# Altium PCB HBridge_V2.3.PcbDoc
Units mil, origin at the board's own origin, x right, y up, seen from the top; angles counter-clockwise.
Board outline 1300 x 1250 mil, 2 copper layers (Top Layer, Bottom Layer); 37 components, 32 nets, 126 pads, 32 vias.
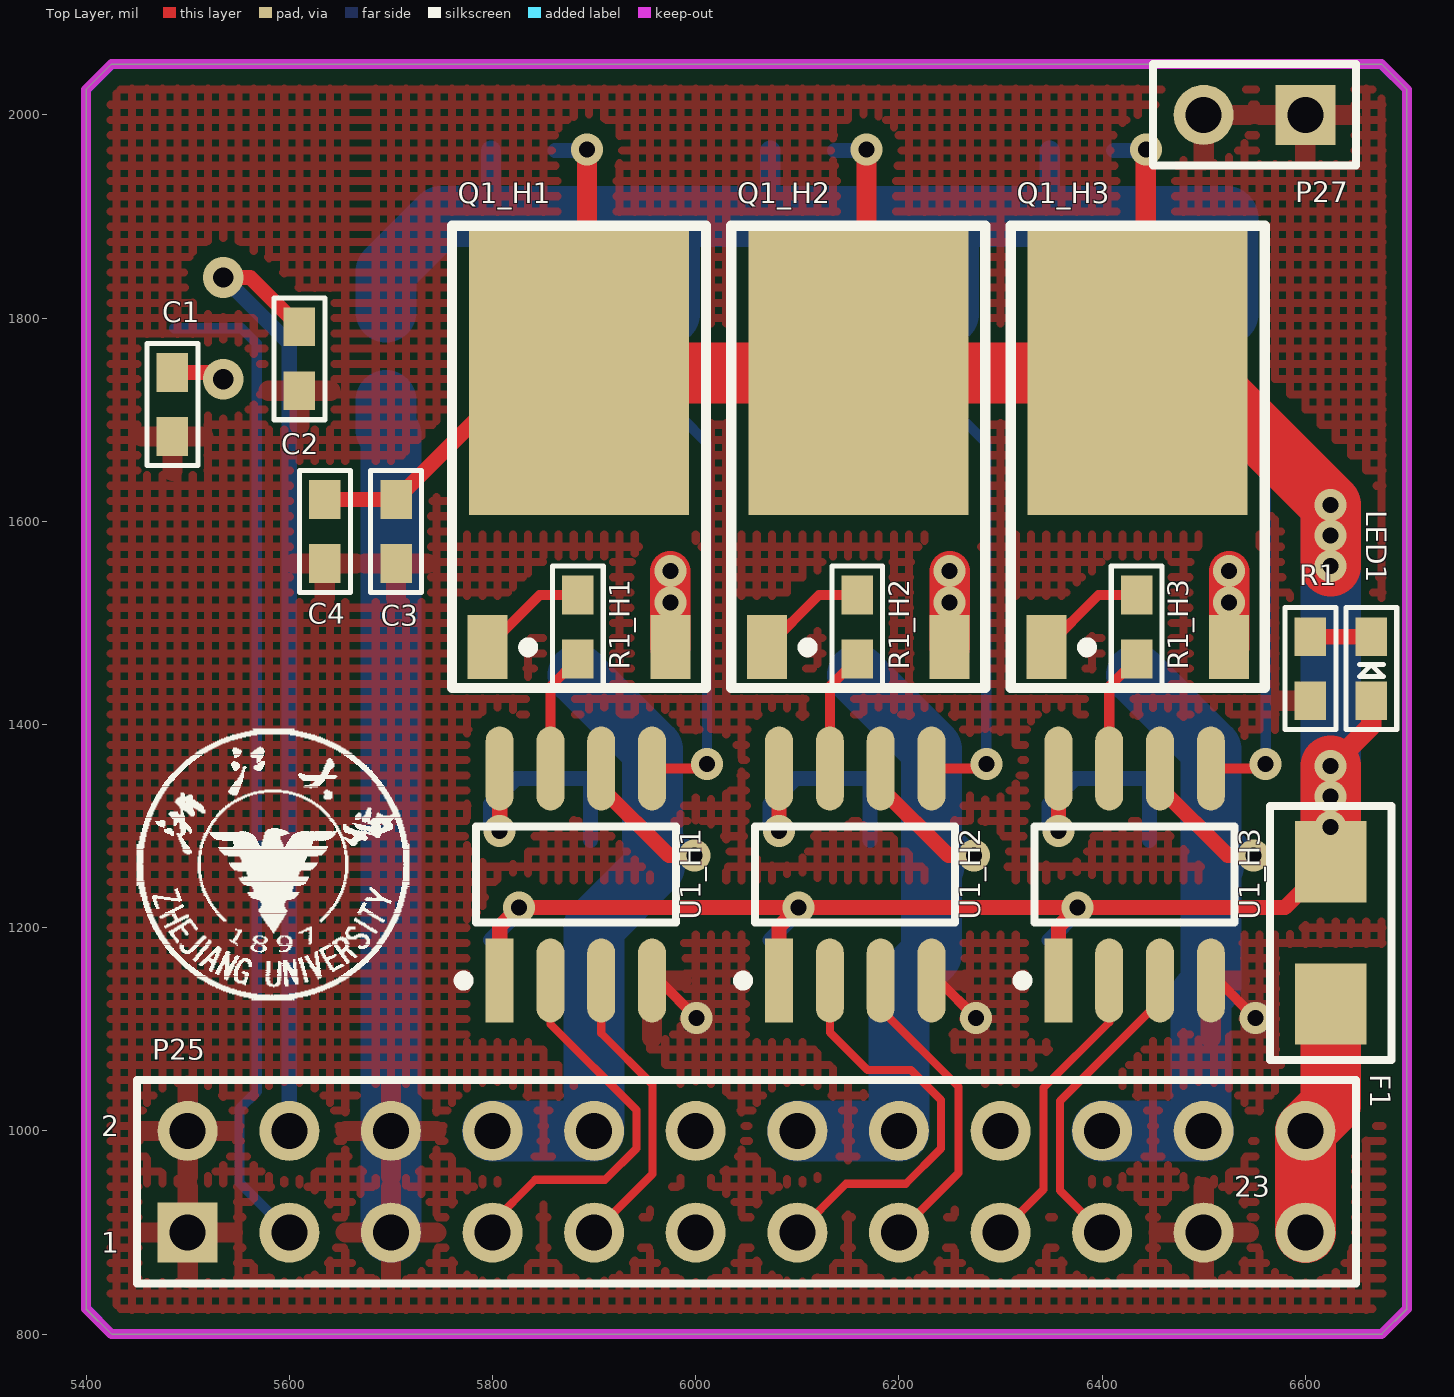
[diagram p0: Top Layer view]
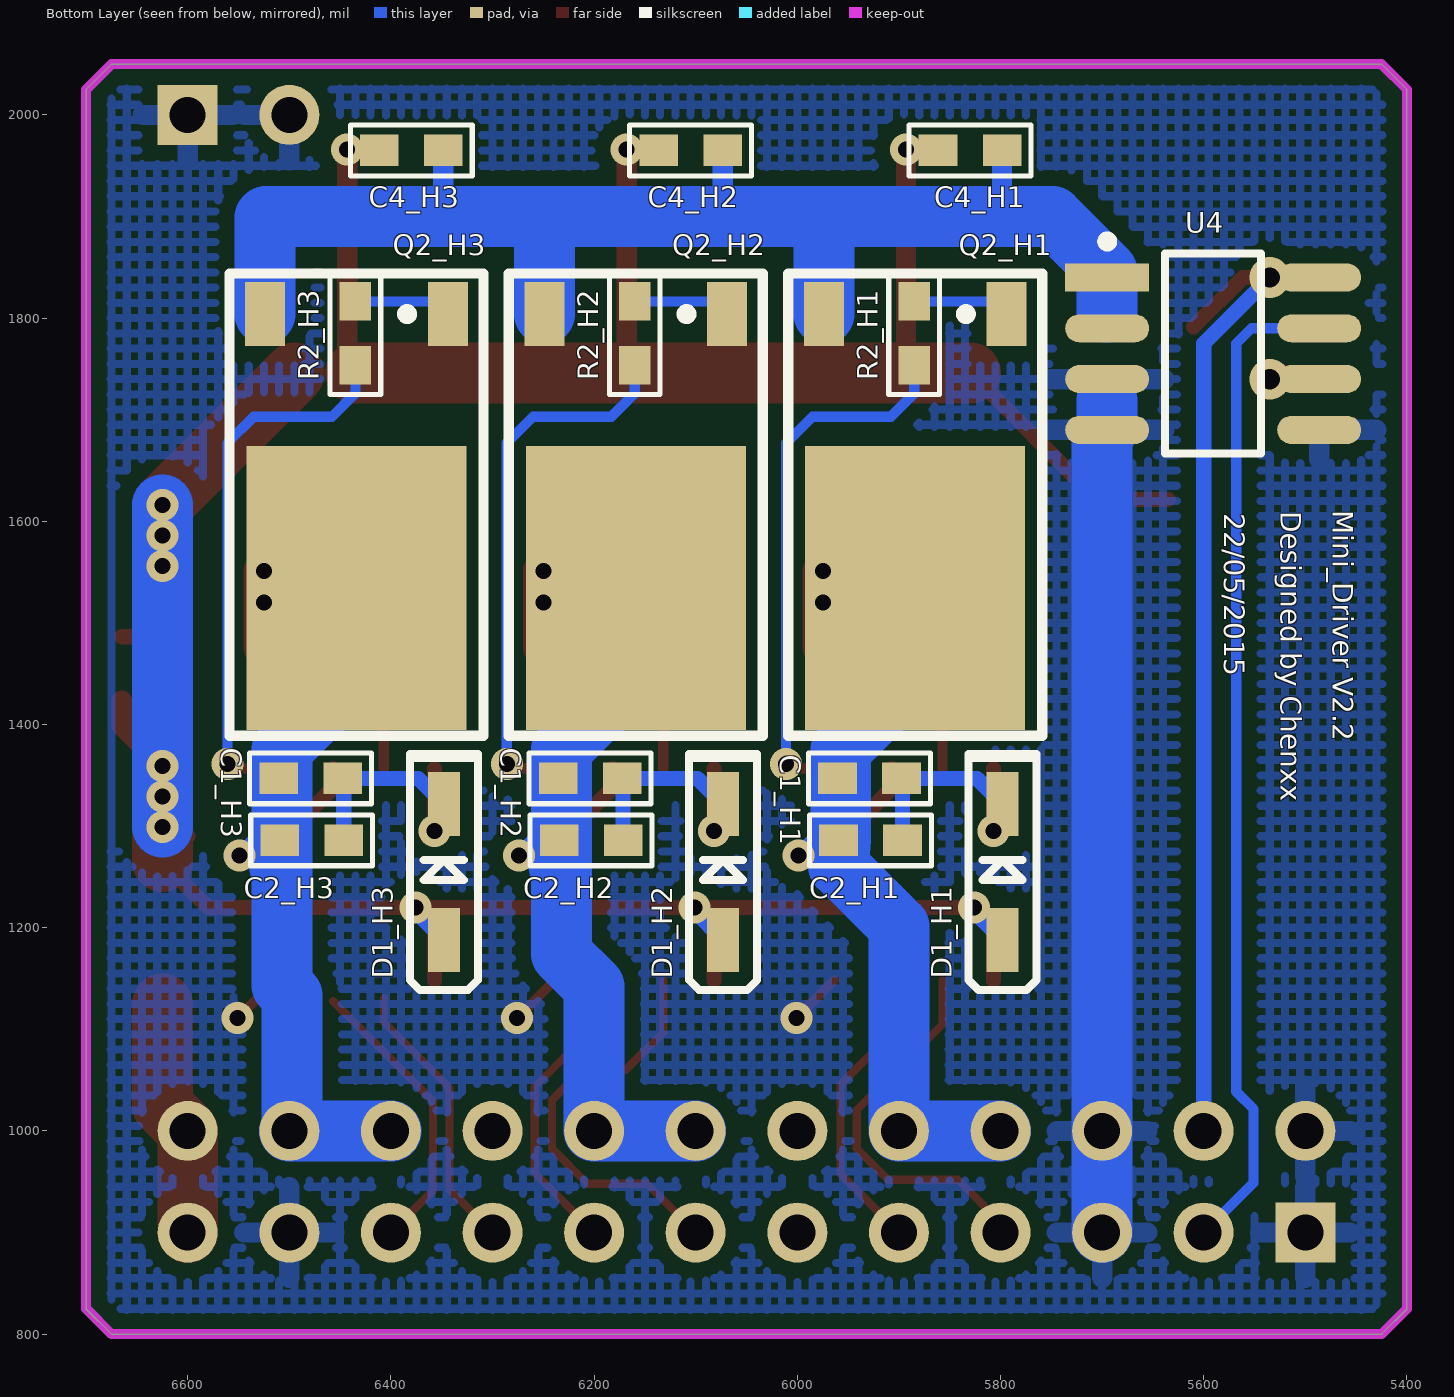
[diagram p1: Bottom Layer view, seen from below]

## Layer stack, top to bottom
Top Layer: signal copper 1.4
Dielectric: dielectric 12.6, FR-4, Dk 4.8
Bottom Layer: signal copper 1.4

## Board outline
5425,2050 5400,2025 5400,825 5425,800 6675,800 6700,825 6700,2025 6675,2050

## Design rules (kind name [scope] priority, off if disabled: settings)
Clearance Clearance_1 [(InPolygon)] p1: gap=15
Clearance [All] p2: gap=8
ComponentClearance [All] p1 off: gap=10 collisioncheckmode=3 verticalgap=10 showdistances=FALSE
Height [All] p1 off: minheight=0 maxheight=1000 prefheight=500
MinimumSolderMaskSliver [All] p1 off: minsoldermaskwidth=10
PlaneConnect [All] p1: planeconnectstyle=Relief reliefexpansion=20 reliefentries=4 reliefconductorwidth=20 reliefairgap=10
PolygonConnect PolygonConnect_1 [IsVia] p1: connectstyle=Direct reliefconductorwidth=15 reliefentries=4 polygonreliefangle="90 Angle"
PolygonConnect [All] p2: connectstyle=Relief reliefconductorwidth=20 reliefentries=4 polygonreliefangle="90 Angle"
RoomDefinition H3 [InComponentClass('H3')] p1: confinementstyle=ConfineIn formatcopy=TRUE lockcomponents=FALSE outline 6299,1077 6575,1077 6575,2003 6299,2003
RoomDefinition H2 [InComponentClass('H2')] p2: confinementstyle=ConfineIn formatcopy=TRUE lockcomponents=FALSE outline 6024,1077 6300,1077 6300,2003 6024,2003
RoomDefinition H1 [InComponentClass('H1')] p3: confinementstyle=ConfineIn formatcopy=TRUE lockcomponents=FALSE outline 5749,1077 6025,1077 6025,2003 5749,2003
RoomDefinition Sheet1 [InComponentClass('Sheet1')] p4: confinementstyle=ConfineIn formatcopy=TRUE lockcomponents=FALSE outline 7112,700 7236,700 7236,839 7112,839
RoutingVias [All] p1: holewidth=28 width=50 viastyle="Through Hole" minholewidth=3.94 minwidth=3.94 maxholewidth=196.85 maxwidth=196.85
SilkToSilkClearance [All] p1 off: silktosilkclearance=10
SilkscreenOverComponentPads [All] p1 off: minsilkscreentomaskgap=10
SolderMaskExpansion [All] p1: expansion=4
TestPointUsage [All] p1: valid=0 allowmultiple=FALSE
Testpoint [All] p1: side=15 testpointundercomponent=TRUE minsize=40 maxsize=100 preferedsize=60 minholesize=0 maxholesize=40 preferedholesize=32 testpointgrid=1 style=1023 order=0-112345678
Width [All] p1: maxlimit=100 minlimit=8 preferedwidth=10
18 further rules are at their usual default settings.

## Classes and differential pairs
component class Sheet1: C1 C2 C3 C4 F1 LED1 P25 P27 R1 U4
net class HIN[1..3]: HIN1 HIN2 HIN3
net class LIN[1..3]: LIN1 LIN2 LIN3
component class H1: C1_H1 C2_H1 C4_H1 D1_H1 Q1_H1 Q2_H1 R1_H1 R2_H1 U1_H1
component class H2: C1_H2 C2_H2 C4_H2 D1_H2 Q1_H2 Q2_H2 R1_H2 R2_H2 U1_H2
component class H3: C1_H3 C2_H3 C4_H3 D1_H3 Q1_H3 Q2_H3 R1_H3 R2_H3 U1_H3
channel class HalfBridge: H1 H2 H3
net class WOUT[1..3]: WOUT1 WOUT2 WOUT3

## Components (designator, comment, footprint, x,y, rotation, side; value= is the part's Value field where it differs from the comment)
C1 "1nF" 0603 5485,1715 r90 top
C1_H1 "1uF" 0603 5929,1347 r0 bottom (schematic designator C1)
C1_H2 "1uF" 0603 6204,1347 r0 bottom (schematic designator C1)
C1_H3 "1uF" 0603 6479,1347 r0 bottom (schematic designator C1)
C2 "0.1uF" 0603 5610,1760 r90 top
C2_H1 "0.1uF" 0603 5928,1286 r0 bottom (schematic designator C2)
C2_H2 "0.1uF" 0603 6203,1286 r0 bottom (schematic designator C2)
C2_H3 "0.1uF" 0603 6478,1286 r0 bottom (schematic designator C2)
C3 "0.1uF" 0603 5705,1590 r90 top
C4 "10uF" 0603 5635,1590 r90 top
C4_H1 "0.22uF" 0603 5830,1965 r0 bottom (schematic designator C4)
C4_H2 "0.22uF" 0603 6105,1965 r0 bottom (schematic designator C4)
C4_H3 "0.22uF" 0603 6380,1965 r0 bottom (schematic designator C4)
D1_H1 "1N5819" SOD-123 5798,1188 r90 bottom (schematic designator D1)
D1_H2 "1N5819" SOD-123 6073,1188 r90 bottom (schematic designator D1)
D1_H3 "1N5819" SOD-123 6348,1188 r90 bottom (schematic designator D1)
F1 "FUSE" FUSE 6625,1125 r180 top
LED1 "led" 0603_diode 6665,1455 r90 top
P25 "Header 12X2" HDR2X12 5500,900 r0 top
P27 "Header 2" HDR1X2 6600,2000 r180 top
Q1_H1 "IRFRU1205" TO-252 6010,1891 r90 top (schematic designator Q1)
Q1_H2 "IRFRU1205" TO-252 6285,1891 r90 top (schematic designator Q1)
Q1_H3 "IRFRU1205" TO-252 6560,1891 r90 top (schematic designator Q1)
Q2_H1 "IRFRU1205" TO-252 6009,1389 r270 bottom (schematic designator Q2)
Q2_H2 "IRFRU1205" TO-252 6284,1389 r270 bottom (schematic designator Q2)
Q2_H3 "IRFRU1205" TO-252 6559,1389 r270 bottom (schematic designator Q2)
R1 "res" 0603 6605,1455 r90 top
R1_H1 "100R" 0603 5884,1496 r90 top (schematic designator R1)
R1_H2 "100R" 0603 6159,1496 r90 top (schematic designator R1)
R1_H3 "100R" 0603 6434,1496 r90 top (schematic designator R1)
R2_H1 "100R" 0603 5885,1785 r90 bottom (schematic designator R2)
R2_H2 "100R" 0603 6160,1785 r90 bottom (schematic designator R2)
R2_H3 "100R" 0603 6435,1785 r90 bottom (schematic designator R2)
U1_H1 "IR2103" SOIC-8 5807,1148 r0 top (schematic designator U1)
U1_H2 "IR2103" SOIC-8 6082,1148 r0 top (schematic designator U1)
U1_H3 "IR2103" SOIC-8 6357,1148 r0 top (schematic designator U1)
U4 "ACS712" SOIC-8 5695,1840 r270 bottom

## Footprints (in the part's own frame and the unit in brackets; to place one, negate y for a bottom-side part, rotate by r counter-clockwise, add the part's x,y. Pads: shape width x height; smd on the part's side, far side on the other; paste and mask are expansions set on the pad)
0603 [mil]
  rect 38x31 smd: 1(-31.5,0) 2(31.5,0)
  silkscreen extent -60,-25 60,25
0603_diode [mil]
  rect 38x31 smd: 1(-31.5,0) 2(31.5,0)
  silkscreen extent -60,-25 60,25
FUSE [mil]
  rect 70x80 smd: 1(0,0) 2(0,-140)
  silkscreen extent -60,-195 60,55
HDR1X2 [mm] "Connector; Header; 2 Position"
  rect 1.5x1.5 hole 0.9: 1(0,0)
  round 1.5 hole 0.9: 2(2.54,0)
  silkscreen extent -1.27,-1.27 3.81,1.27
HDR2X12 [mm] "Connector; Header; 12x2 Position"
  rect 1.5x1.5 hole 0.9: 1(0,0)
  round 1.5 hole 0.9: 2(0,2.54) 3(2.54,0) 4(2.54,2.54) 5(5.08,0) 6(5.08,2.54) 7(7.62,0) 8(7.62,2.54) 9(10.16,0) 10(10.16,2.54) 11(12.7,0) 12(12.7,2.54) 13(15.24,0) 14(15.24,2.54) 15(17.78,0) 16(17.78,2.54) 17(20.32,0) 18(20.32,2.54) 19(22.86,0) 20(22.86,2.54) 21(25.4,0) 22(25.4,2.54) 23(27.94,0) 24(27.94,2.54)
  silkscreen extent -1.27,-1.27 29.21,3.81
SOD-123 [mm]
  rect 1.6x0.8 smd: A(0,0) K(3.4,0)
  silkscreen extent -1.25,-0.85 4.65,0.85
SOIC-8 [mm]
  rect 0.7x2.1 smd: 1(0,0)
  oval 0.7x2.1 smd: 2(1.27,0) 3(2.54,0) 4(3.81,0) 5(3.81,5.3) 6(2.54,5.3) 7(1.27,5.3) 8(0,5.3)
  silkscreen extent -1.02,-0.12 4.41,3.85
TO-252 [mm]
  rect 1.6x1 smd: 1(-10.537,5.46) 3(-10.537,0.89)
  rect 7.1x5.5 smd: 2(-3.687,3.175)
  silkscreen extent -11.56,0 0,6.35

## Part data
C1 C1_H1 C1_H2 C1_H3 C2 C2_H1 C2_H2 C2_H3 C3 C4 C4_H1 C4_H2 C4_H3: library part cap
D1_H1 D1_H2 D1_H3: library part diode
P25: "Header, 12-Pin, Dual row"
P27: "Header, 2-Pin"
R1_H1 R1_H2 R1_H3 R2_H1 R2_H2 R2_H3: library part res

## Via types
v1: diameter 31.5, hole 15.75, Top Layer to Bottom Layer, 30 vias
v2: diameter 40, hole 20, Top Layer to Bottom Layer, 2 vias

## Nets (pads, with @x,y where several pads share a name; then routed paths per layer and width w, separated by ;. In a path a pad name is that pad's centre, name@x,y a point inside that pad or via, vN(x,y) a via of type N, cw(c..) or ccw(c..) an arc to the next point about the centre after c; other vN are vias at no path point)
16V_REGULATOR: F1.1 P25.23 P25.24 | length 235.4
  Top Layer w60: P25.23 P25.24 6625,1025 F1.1
+5V: C2.2 P25.4 U4.8 | length 962
  Top Layer w15: v2(5535,1840) 5561.5,1840 C2.2
  Bottom Layer w15: v2(5535,1840) 5600,1775 P25.4
+16V: C3.2 C4.2 C4_H1.2 C4_H2.2 C4_H3.2 D1_H1.A D1_H2.A D1_H3.A F1.2 LED1.1 Q1_H1.2 Q1_H2.2 Q1_H3.2 U1_H1.1 U1_H2.1 U1_H3.1 | length 3542.8
  Top Layer w15: C4.2 C3.2 Q1_H1.2@5829.34,1745.84 ; U1_H1.1 5807,1201 v1(5826,1220) 6580,1220 F1.2 F1.2@6600,1290 ; U1_H2.1 6082,1201 v1(6101,1220) ; U1_H3.1 6357,1201 v1(6376,1220)
  Top Layer w20: Q1_H1.2@5893,1753.84 v1(5893,1966) ; Q1_H2.2@6168,1753.84 v1(6168,1966) ; Q1_H3.2@6443,1753.84 v1(6443,1966) ; v1(6625,1359) 6665,1399 LED1.1
  Top Layer w60: Q1_H1.2@5829.34,1745.84 Q1_H3.2 ; Q1_H3.2@6495.16,1745.84 v1(6625,1616) v1(6625,1556) ; F1.2 v1(6625,1359)
  Bottom Layer w15: D1_H1.A v1@5826,1216 ; C4_H1.2 5892,1965 v1(5893,1966) ; D1_H2.A v1@6101,1216 ; C4_H2.2 6167,1965 v1(6168,1966) ; D1_H3.A v1@6376,1216 ; C4_H3.2 6442,1965 v1(6443,1966)
  Bottom Layer w20: v1@5826,1216 v1(5826,1220) ; v1@6101,1216 v1(6101,1220) ; v1@6376,1216 v1(6376,1220)
  Bottom Layer w60: v1(6625,1299) v1(6625,1616)
  other v1: 6625,1329 6625,1586
CURRENT: P25.3 U4.7 | length 990.2
  Bottom Layer w10: U4.7 5553,1790 5568,1775 5568,1038.67 5551,1021.67 5551,949 P25.3
GND: C1.1 C2.1 C3.1 C4.1 P25.1 P25.2 P25.5 P25.6 P25.21 P27.1 P27.2 R1.1 U1_H1.4 U1_H2.4 U1_H3.4 U4.3 U4.4 U4.5 | length 971
  Top Layer w10: U1_H1.4@5964,1148 v1(6001,1111) ; U1_H2.4@6239,1148 v1(6276,1111) ; U1_H3.4@6514,1148 v1(6551,1111)
  Bottom Layer w60: U4.4 5695,1719 ; P25.5 U4.4@5700,1685
HIN1: P25.7 U1_H1.2 | length 381.9
  Top Layer w8: P25.7 5800,910 5842,952 5910.73,952 5941.53,982.8 5941.53,1020.47 5857,1105 U1_H1.2
HIN2: P25.13 U1_H2.2 | length 411.6
  Top Layer w8: P25.13 6148,948 6206.73,948 6241.53,982.8 6241.53,1030.47 6212,1060 6169,1060 6132,1097 U1_H2.2
HIN3: P25.17 U1_H3.2 | length 275.3
  Top Layer w8: P25.17 6342.47,942.47 6342.47,1042.47 6407,1107 U1_H3.2@6407,1131
LIN1: P25.9 U1_H1.3 | length 292.8
  Top Layer w8: P25.9 5957.53,957.53 5957.53,1045.59 5907,1096.12 U1_H1.3
LIN2: P25.15 U1_H2.3 | length 275.9
  Top Layer w8: U1_H2.3@6182,1120 6258.47,1043.53 6258.47,958.47 P25.15
LIN3: P25.19 U1_H3.3 | length 286
  Top Layer w8: P25.19 6358.47,941.53 6358.47,1029.47 U1_H3.3@6457,1128
NetC1_2: C1.2 U4.6 | length 52.7
  Top Layer w10: v2@5528.5,1746.5 v2(5535,1740)
  Top Layer w15: C1.2 v2@5528.5,1746.5
NetC1_H1_1: C1_H1.1 C2_H1.1 D1_H1.K U1_H1.8 | length 262.2
  Top Layer w15: v1(5807,1295) U1_H1.8
  Bottom Layer w15: v1(5807,1295) 5798,1304 D1_H1.K 5823.14,1347 C1_H1.1 ; C2_H1.1 C1_H1.1@5896.5,1346
NetC1_H2_1: C1_H2.1 C2_H2.1 D1_H2.K U1_H2.8 | length 262.2
  Top Layer w15: v1(6082,1295) U1_H2.8
  Bottom Layer w15: v1(6082,1295) 6073,1304 D1_H2.K 6098.14,1347 C1_H2.1 ; C2_H2.1 C1_H2.1@6171.5,1346
NetC1_H3_1: C1_H3.1 C2_H3.1 D1_H3.K U1_H3.8 | length 262.2
  Top Layer w15: v1(6357,1295) U1_H3.8
  Bottom Layer w15: v1(6357,1295) 6348,1304 D1_H3.K 6373.14,1347 C1_H3.1 ; C2_H3.1 C1_H3.1@6446.5,1346
NetLED1_2: LED1.2 R1.2 | length 60
  Top Layer w15: R1.2 LED1.2
NetQ1_H1_1: Q1_H1.1 R1_H1.2 | length 110.2
  Top Layer w10: Q1_H1.1 5846.38,1527.5 R1_H1.2
NetQ1_H2_1: Q1_H2.1 R1_H2.2 | length 110.2
  Top Layer w10: Q1_H2.1 6121.38,1527.5 R1_H2.2
NetQ1_H3_1: Q1_H3.1 R1_H3.2 | length 110.2
  Top Layer w10: Q1_H3.1 6396.38,1527.5 R1_H3.2
NetQ2_H1_1: Q2_H1.1 R2_H1.2 | length 96.2
  Bottom Layer w10: Q2_H1.1@5806.7,1816.5 R2_H1.2
  Bottom Layer w15: Q2_H1.1 Q2_H1.1@5806.7,1816.5
NetQ2_H2_1: Q2_H2.1 R2_H2.2 | length 96.2
  Bottom Layer w10: Q2_H2.1@6081.7,1816.5 R2_H2.2
  Bottom Layer w15: Q2_H2.1 Q2_H2.1@6081.7,1816.5
NetQ2_H3_1: Q2_H3.1 R2_H3.2 | length 96.2
  Bottom Layer w10: Q2_H3.1@6356.7,1816.5 R2_H3.2
  Bottom Layer w15: Q2_H3.1 Q2_H3.1@6356.7,1816.5
NetR1_H1_1: R1_H1.1 U1_H1.7 | length 119
  Top Layer w10: U1_H1.7 5857,1437.5 R1_H1.1
NetR1_H2_1: R1_H2.1 U1_H2.7 | length 119
  Top Layer w10: U1_H2.7 6132,1437.5 R1_H2.1
NetR1_H3_1: R1_H3.1 U1_H3.7 | length 119
  Top Layer w10: U1_H3.7 6407,1437.5 R1_H3.1
NetR2_H1_1: R2_H1.1 U1_H1.5 | length 545.7
  Top Layer w10: U1_H1.5 6006.66,1356.66 v1(6011,1361)
  Bottom Layer w10: R2_H1.1 5885,1726 5908,1703 5985.11,1703 6011,1677.11 v1(6011,1361)
NetR2_H2_1: R2_H2.1 U1_H2.5 | length 545.7
  Top Layer w10: U1_H2.5 6281.66,1356.66 v1(6286,1361)
  Bottom Layer w10: R2_H2.1 6160,1726 6183,1703 6260.11,1703 6286,1677.11 v1(6286,1361)
NetR2_H3_1: R2_H3.1 U1_H3.5 | length 545.7
  Top Layer w10: U1_H3.5 6556.66,1356.66 v1(6561,1361)
  Bottom Layer w10: R2_H3.1 6435,1726 6458,1703 6535.11,1703 6561,1677.11 v1(6561,1361)
PGND: C4_H1.1 C4_H2.1 C4_H3.1 Q2_H1.3 Q2_H2.3 Q2_H3.3 U4.1 U4.2 | length 1373.5
  Bottom Layer w20: 5798.5,1900.5 C4_H1.1 ; 6073.5,1900.5 C4_H2.1 ; 6348.5,1900.5 C4_H3.1
  Bottom Layer w60: 5695,1806 5695,1845.98 5749.02,1900 6523,1900 6523.96,1899.04 Q2_H3.3 ; 5973,1900 5973.96,1899.04 Q2_H1.3 ; 6248,1900 6248.96,1899.04 Q2_H2.3
WOUT1: C1_H1.2 C2_H1.2 P25.8 P25.10 Q1_H1.3 Q2_H1.2 U1_H1.6 | length 887.3
  Top Layer w15: U1_H1.6 5907,1337.69 5973.69,1271 v1(5999,1271)
  Top Layer w40: Q1_H1.3 v1(5974.96,1550.96)
  Bottom Layer w15: C2_H1.2@5957.25,1288.25 5974.5,1271 v1(5999,1271) 5984,1286
  Bottom Layer w60: P25.8 P25.10 5900,1201.26 5959.5,1260.76 5957.25,1288.25 5957.25,1375.49 Q2_H1.2@5884,1448.74
  other v1: 5974.96,1520
WOUT2: C1_H2.2 C2_H2.2 P25.14 P25.16 Q1_H2.3 Q2_H2.2 U1_H2.6 | length 903.5
  Top Layer w15: U1_H2.6 6182,1337.69 6248.69,1271 v1(6274,1271)
  Top Layer w40: Q1_H2.3 v1(6249.96,1550.96)
  Bottom Layer w15: C2_H2.2@6232.25,1288.25 6249.5,1271 v1(6274,1271) 6259,1286
  Bottom Layer w60: P25.14 P25.16 6200,1142 6232.25,1174.25 C2_H2.2@6232.25,1288.25 ; Q2_H2.2@6159,1448.74 6232.25,1375.49 C2_H2.2@6232.25,1288.25 ; 6234.5,1260.76 C2_H2.2@6232.25,1288.25
  other v1: 6249.96,1520
WOUT3: C1_H3.2 C2_H3.2 P25.20 P25.22 Q1_H3.3 Q2_H3.2 U1_H3.6 | length 908.9
  Top Layer w15: U1_H3.6 6457,1337.69 6523.69,1271 v1(6549,1271)
  Top Layer w40: Q1_H3.3 v1(6524.96,1550.96)
  Bottom Layer w15: C2_H3.2@6507.25,1288.25 6524.5,1271 v1(6549,1271) 6534,1286
  Bottom Layer w30: P25.22 P25.22@6509.5,1009.5
  Bottom Layer w60: P25.20 P25.22 6497.25,1002.75 6497.25,1133.26 6507.25,1143.26 C2_H3.2@6507.25,1288.25 ; Q2_H3.2@6434,1448.74 6507.25,1375.49 C2_H3.2@6507.25,1288.25 ; 6509.5,1260.76 C2_H3.2@6507.25,1288.25
  other v1: 6524.96,1520
pads on no net: P25.11 P25.12 P25.18

## Polygon pours and split planes (outlines as drawn)
GND on Top Layer "Top Layer-No Net" (hatched 90Degree grid 15 track 8, remove dead copper): 6800,700 6800,2100 5300,2100 5300,700
GND on Bottom Layer "Top Layer-No Net" (hatched 90Degree grid 15 track 8, remove dead copper): 5300,2100 6800,2100 6800,700 5300,700

## Keep-outs
Keep-Out Layer:
  the board outline again, w10

## Silkscreen, mask and mechanical layers (free items; w line width, h text height)
Top Overlay:
  drawing of 1934 lines, arcs and shapes, not listed
Bottom Overlay:
  text "Mini_Driver V2.2" at 5473,1611 h20 r90
  text "Designed by Chenxx" at 5524,1610 h20 r90
  text "22/05/2015" at 5580,1608 h20 r90

## Dimensions
5425,800 to 5250,2050 on Top Overlay
5400,2100 to 6700,2150 on Top Overlay
6775,795.04 to 6800,1945.04 on Top Overlay
6850,1800 to 6850,1000 on Top Overlay

## Text inside footprints (layer, text, board x,y; h text height)
P25: Top Overlay "1" at 5415,880 h20; Top Overlay "2" at 5415,995 h20; Top Overlay "23" at 6530,935 h20